# EAGLE board CircuitV2 (EAGLE 9.5.0)
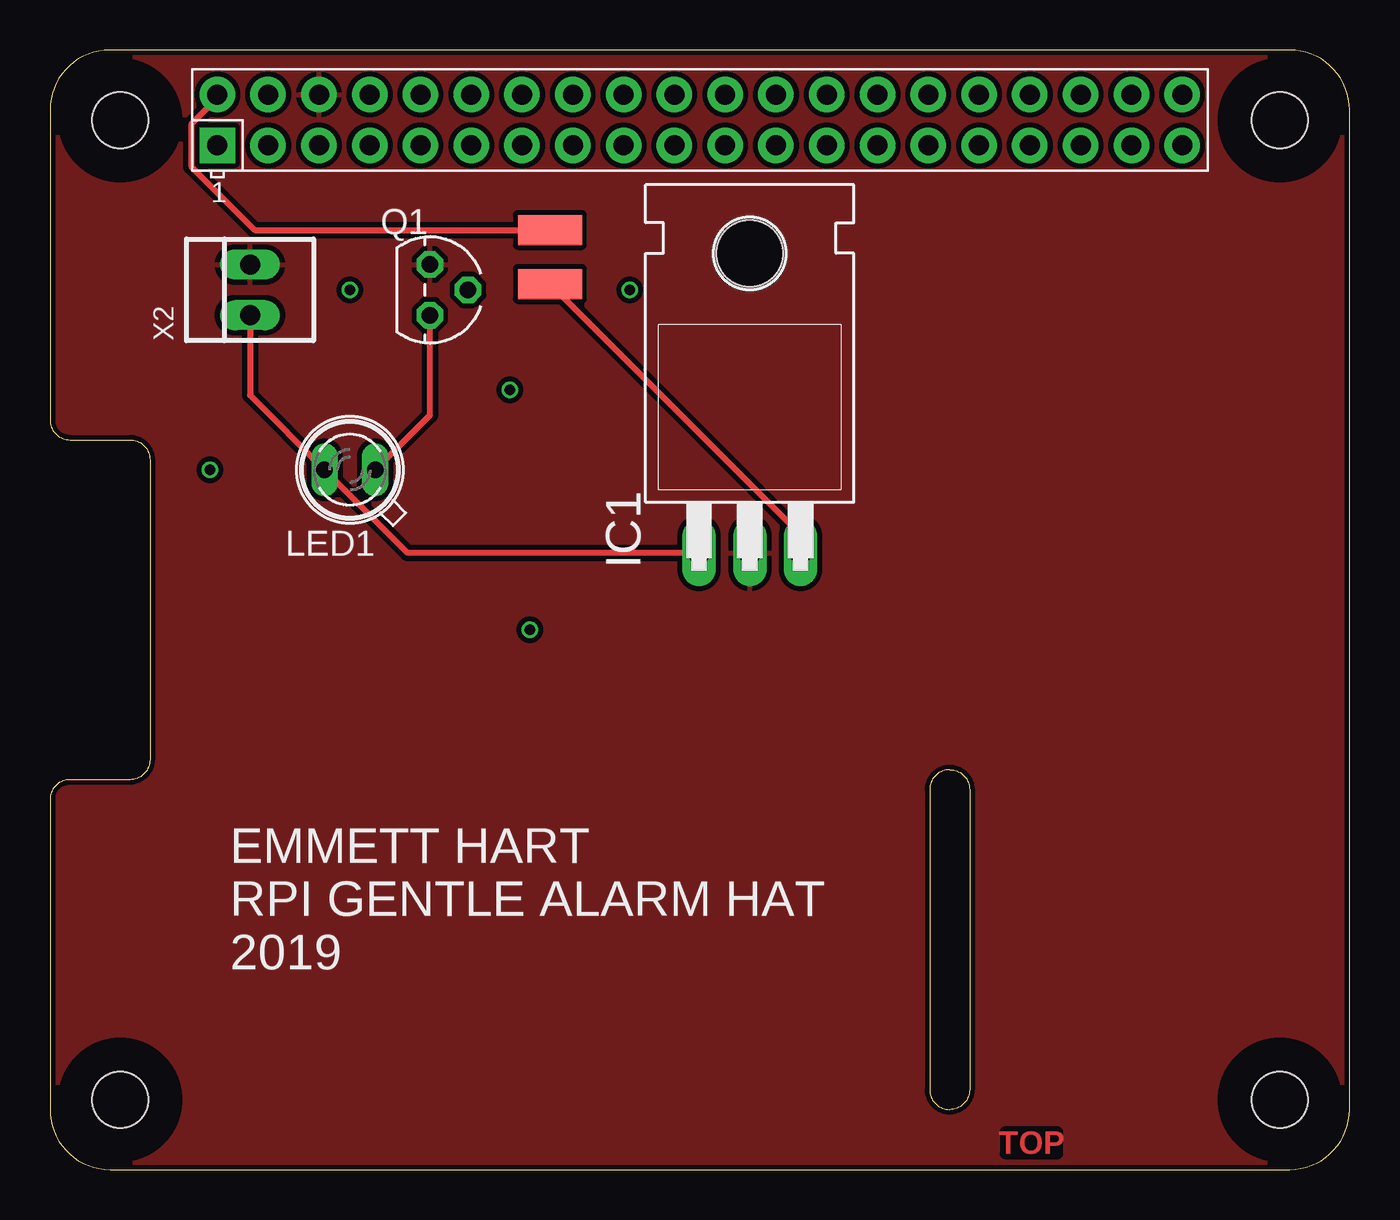
[diagram p0: board, top side]
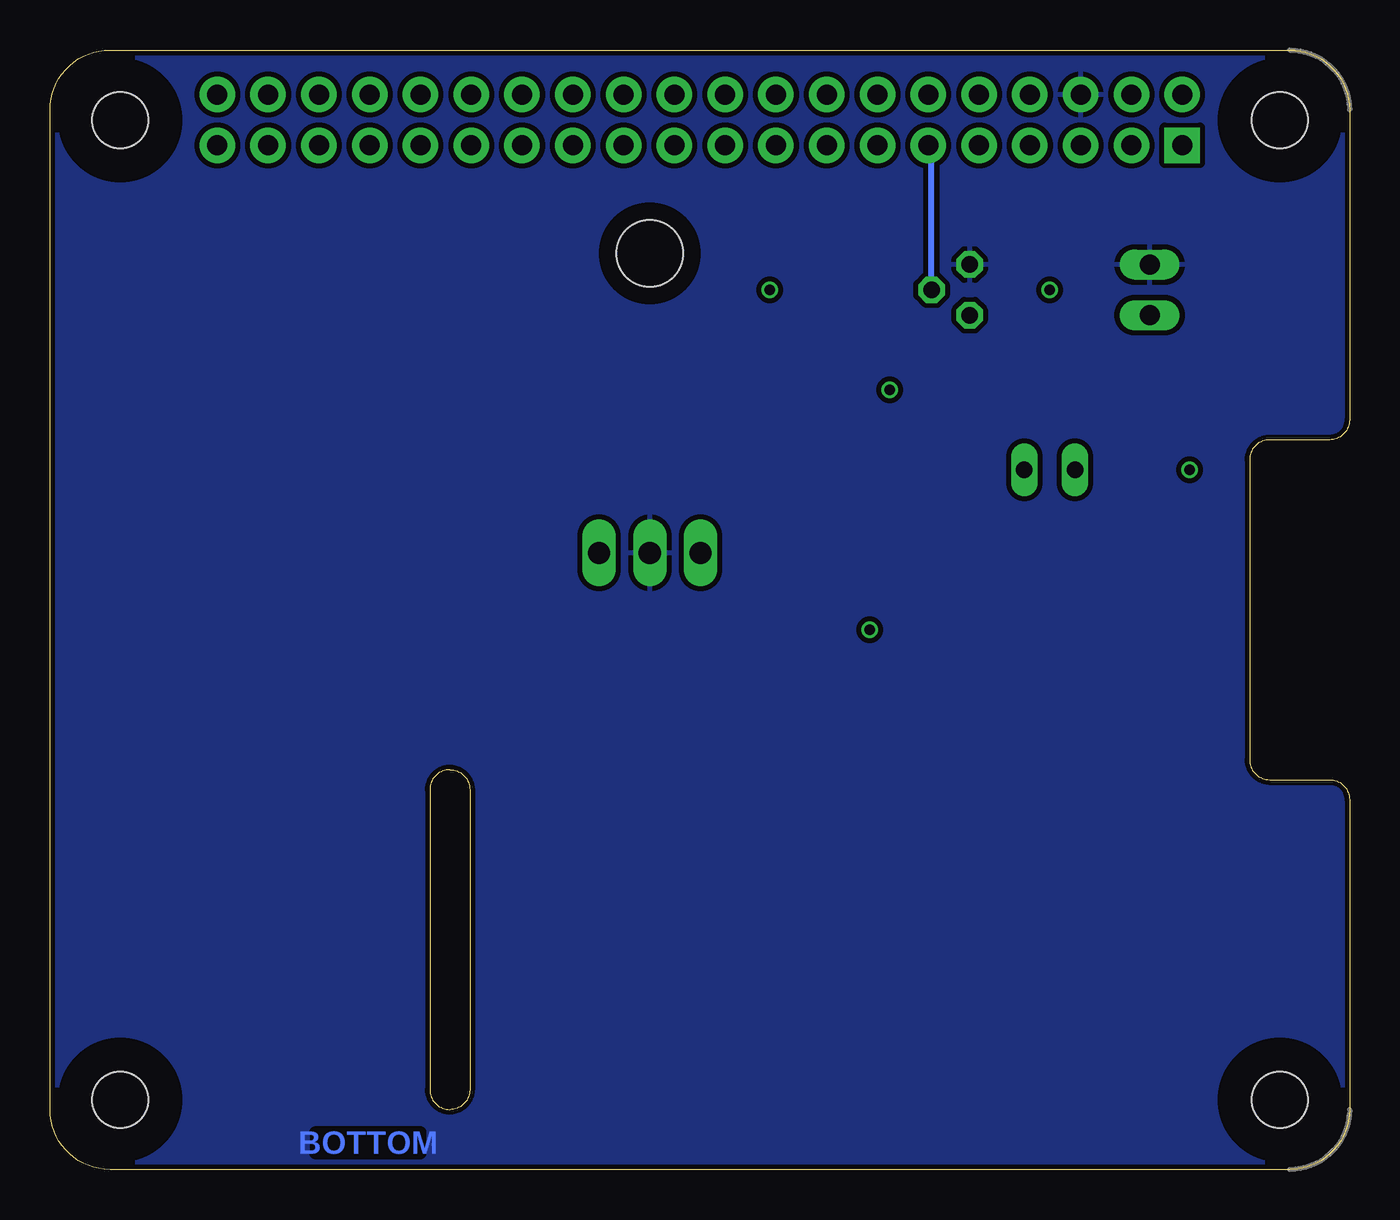
[diagram p1: board, bottom side, seen from below]

Size 65 x 56 mm. Coordinates in mm from the lower left corner, seen from the top.
Outline: 0,3 arc90 3,0 62,0 arc90 65,3 65,53 arc90 62,56 3,56 arc90 0,53 0,37.5 arc90 1,36.5 4,36.5 arc-90 5,35.5 5,20.5 arc-90 4,19.5 1,19.5 arc90 0,18.5 0,3
Outline: 44,19 44,4 arc90 45,3 arc90 46,4 46,19 arc90 45,20 arc90 44,19
Copper layers (1*16): Top 0.035mm / dielectric 1.5mm / Bottom 0.035mm
Design rules "ITEADstudio_DRC": minimum track width 6mil, minimum drill 12mil, track to track 6mil, track to pad 6mil, pad to pad 6mil, via to via 6mil, smd to smd 0mil, copper to edge 10mil, drill to drill 10mil, minimum pad ring 10mil, minimum via ring 6mil, stop-mask expansion 2mil, vias tented up to drill 100mil, thermal gap 10mil
Net classes: 0 default: width 0.305 mm, drill 0.508 mm, clearance 0.254 mm
Holes 2.8 mm at 3.5,3.5 3.5,52.5 61.5,52.5 61.5,3.5
tRestrict: area 1.9,51 to 5,54; area 60,51 to 63,54; area 60,1.9 to 63,5; area 1.9,1.9 to 5,5
bRestrict: area 1.9,1.9 to 5,5; area 1.9,51 to 5,54; area 60,1.9 to 63,5; area 60,51 to 63,54
Milling: 6 lines

## Footprints (pad centres in the part's own frame; a part is rotated, then mirrored left to right if it is on the bottom)
MF-MSMF260-2 = smd 1.5 x 3.2: P$1 0,0; P$2 -2.7,0
TO220H = drill 1.118 long: 1 -2.54,-10.16; 2 0,-10.16; 3 2.54,-10.16 | hole 3.302: 0,4.826
SFH482 = drill 0.813 long: A -1.27,0; K 1.27,0
TO-92 = drill 0.813 octagon: 1 -1.27,0; 2 0,1.905; 3 1.27,0
RASPI_BOARD_B+_EDGES_0DRILL = drill 1 pad 1.778 square: 1 8.37,51.23 | drill 1 pad 1.778: 2 8.37,53.77; 3 10.91,51.23; 4 10.91,53.77; 5 13.45,51.23; 6 13.45,53.77; 7 15.99,51.23; 8 15.99,53.77; 9 18.53,51.23; 10 18.53,53.77; 11 21.07,51.23; 12 21.07,53.77; 13 23.61,51.23; 14 23.61,53.77; 15 26.15,51.23; 16 26.15,53.77; 17 28.69,51.23; 18 28.69,53.77; 19 31.23,51.23; 20 31.23,53.77; 21 33.77,51.23; 22 33.77,53.77; 23 36.31,51.23; 24 36.31,53.77; 25 38.85,51.23; 26 38.85,53.77; 27 41.39,51.23; 28 41.39,53.77; 29 43.93,51.23; 30 43.93,53.77; 31 46.47,51.23; 32 46.47,53.77; 33 49.01,51.23; 34 49.01,53.77; 35 51.55,51.23; 36 51.55,53.77; 37 54.09,51.23; 38 54.09,53.77; 39 56.63,51.23; 40 56.63,53.77
22-23-2021 = drill 1 long: 1 -1.27,0; 2 1.27,0

## Placement (x,y rotation side)
F1  [MF-MSMF260-2]  25,47 90 top
IC1  7805T  [TO220H]  35,41 0 top
LED1  [SFH482]  15,35 180 top
Q1  [TO-92]  19,44 270 top
X1  RASPI_BOARD_B+_E0  [RASPI_BOARD_B+_EDGES_0DRILL]  0,0 0 top
X2  22-23-2021  [22-23-2021]  10,44 90 top

## Library data of the parts
F1 = Test
IC1 = linear; MPN: NCP7805TG; OC_NEWARK: 81Y6957
LED1 = adafruit; OC_NEWARK: unknown
Q1 = transistors; MPN: 2N7000.; OC_NEWARK: 26AC6371
X1 = raspberrypi_bastelstube_v13; OC_NEWARK: unknown
X2 = con-molex; MF: MOLEX; MPN: 22-23-2021; OC_FARNELL: 1462926; OC_NEWARK: 25C3832

## Nets
3V3: X1.1
GND: IC1.2 Q1.1 X1.6 X2.2
GPIO17: Q1.2 X1.11
N$1: F1.P$1 X1.2
N$2: F1.P$2 IC1.3
N$6: LED1.A Q1.3
VCC: IC1.1 LED1.K X2.1

## Tracks (layer width: path | path; a pad name or v marks a point on that pad's centre or on a via)
GND
  pour Bottom: 0,3 arc90 3,0 62,0 arc90 65,3 65,53 arc90 62,56 3,56 arc90 0,53 0,37.5 arc90 1,36.5 4,36.5 arc-90 5,35.5 5,20.5 arc-90 4,19.5 1,19.5 arc90 0,18.5
  pour Top: 0,3 arc90 3,0 62,0 arc90 65,3 65,53 arc90 62,56 3,56 arc90 0,53 0,37.5 arc90 1,36.5 4,36.5 arc-90 5,35.5 5,20.5 arc-90 4,19.5 1,19.5 arc90 0,18.5
GPIO17
  Bottom 0.305: Q1.2 20.91,51.06 X1.11
N$1
  Top 0.305: F1.P$1 10.25,47 7.08,50.17 7.08,52.29 8.37,53.58 X1.2
N$2
  Top 0.305: F1.P$2 37.54,31.76 IC1.3
N$3  (via drill 0.51)
  other vias: 15,44
N$4  (via drill 0.51)
  other vias: 23,39
N$5  (via drill 0.51)
  other vias: 8,35
N$6
  Top 0.305: LED1.A 19,37.73 Q1.3
N$7  (via drill 0.51)
  other vias: 24,27
N$8  (via drill 0.51)
  other vias: 29,44
VCC
  Top 0.305: IC1.1 17.89,30.84 LED1.K 10,38.73 X2.1

## Text on the board
Top: TOP
Bottom: BOTTOM
tPlace: EMMETT HART / RPI GENTLE ALARM HAT / 2019